# Altium PCB 角度采集板.PcbDoc
Units mil, origin at the board's own origin, x right, y up, seen from the top; angles counter-clockwise.
Board outline 741.2 x 561.03 mil, 2 copper layers (Top Layer, Bottom Layer); 22 components, 16 nets, 111 pads, 16 vias.
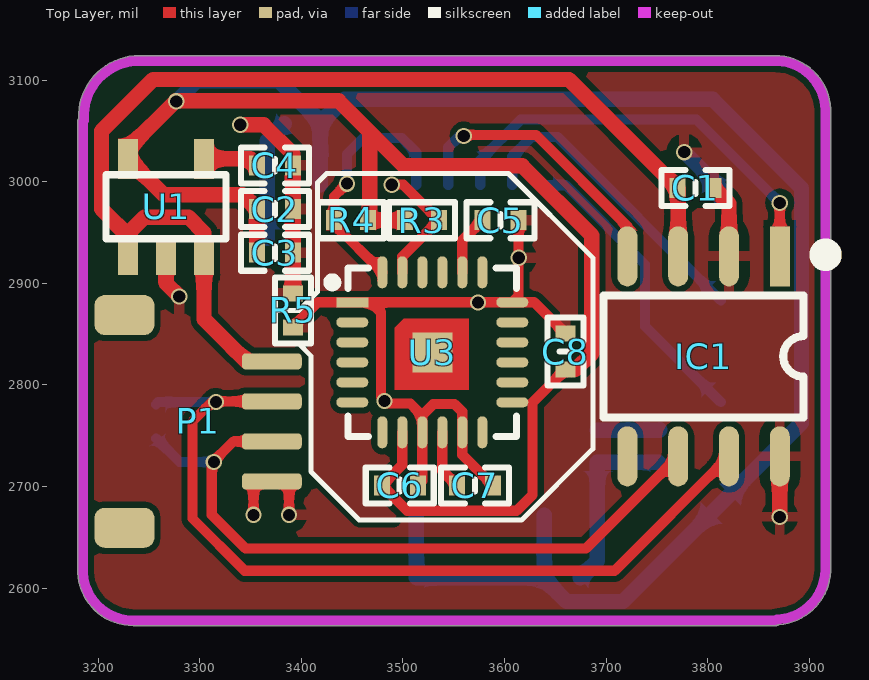
[diagram p0: Top Layer view]
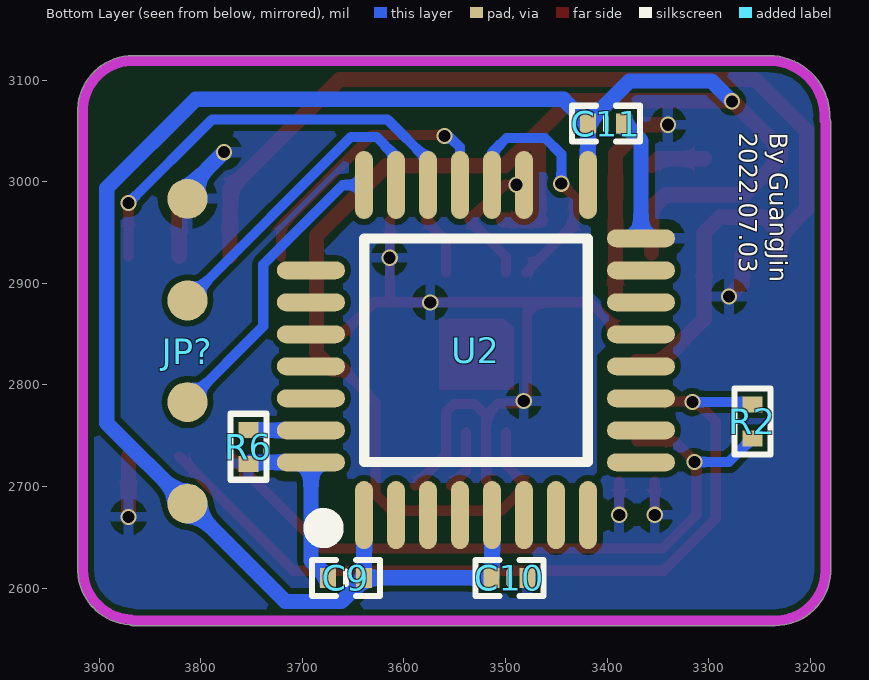
[diagram p1: Bottom Layer view, seen from below]
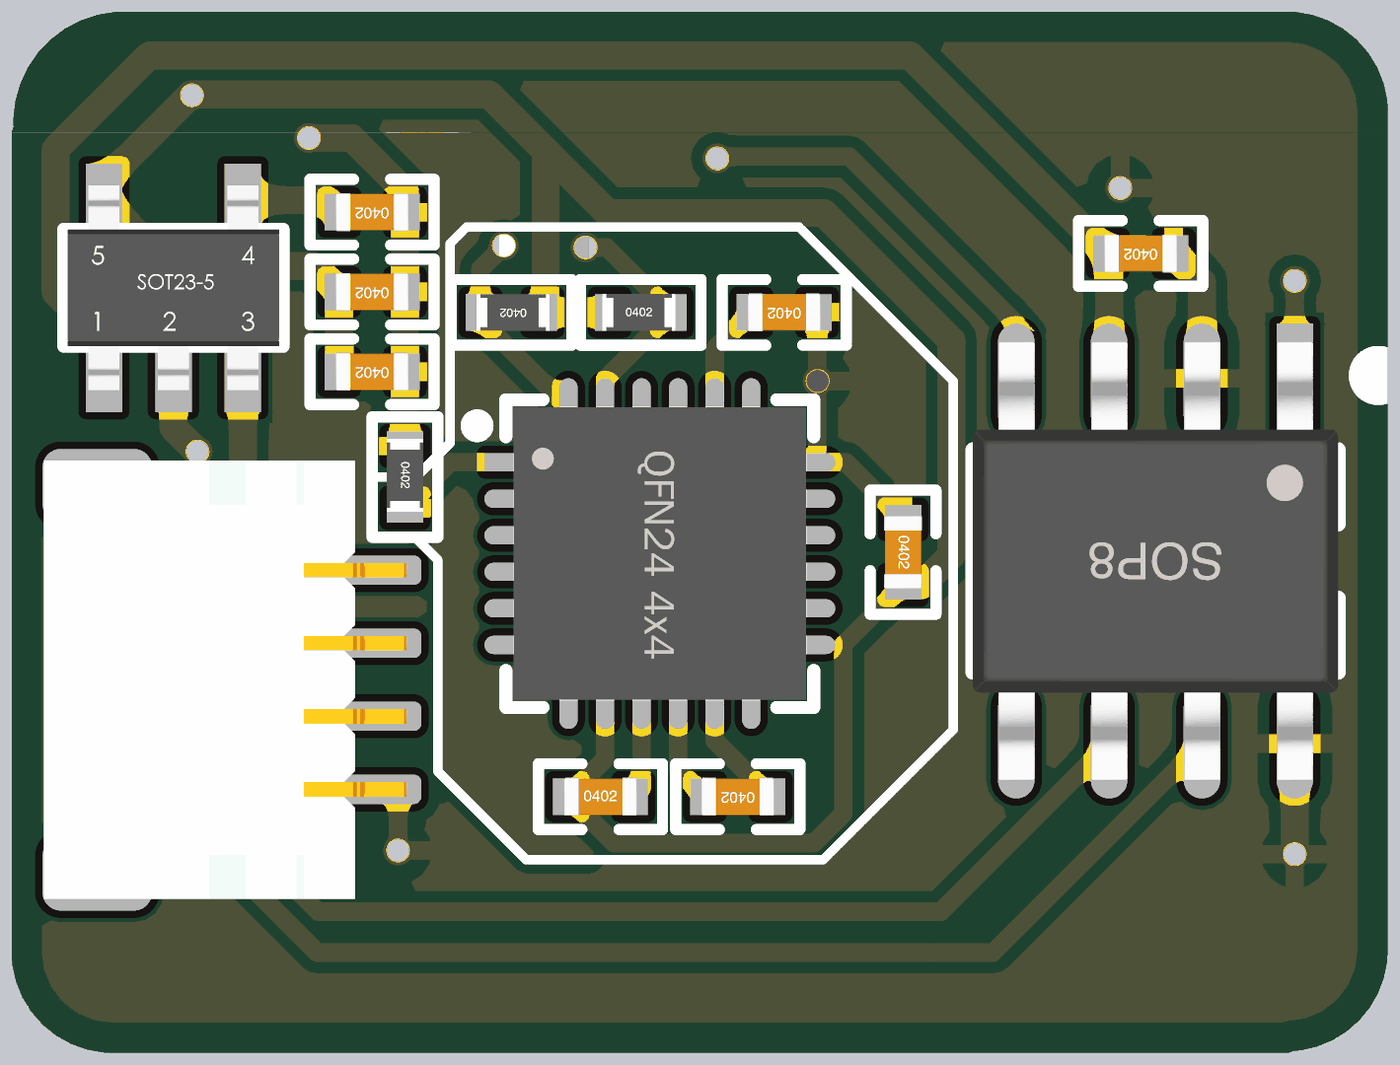
[diagram p2: 3D render of the assembled board from above, using the file's embedded part models]
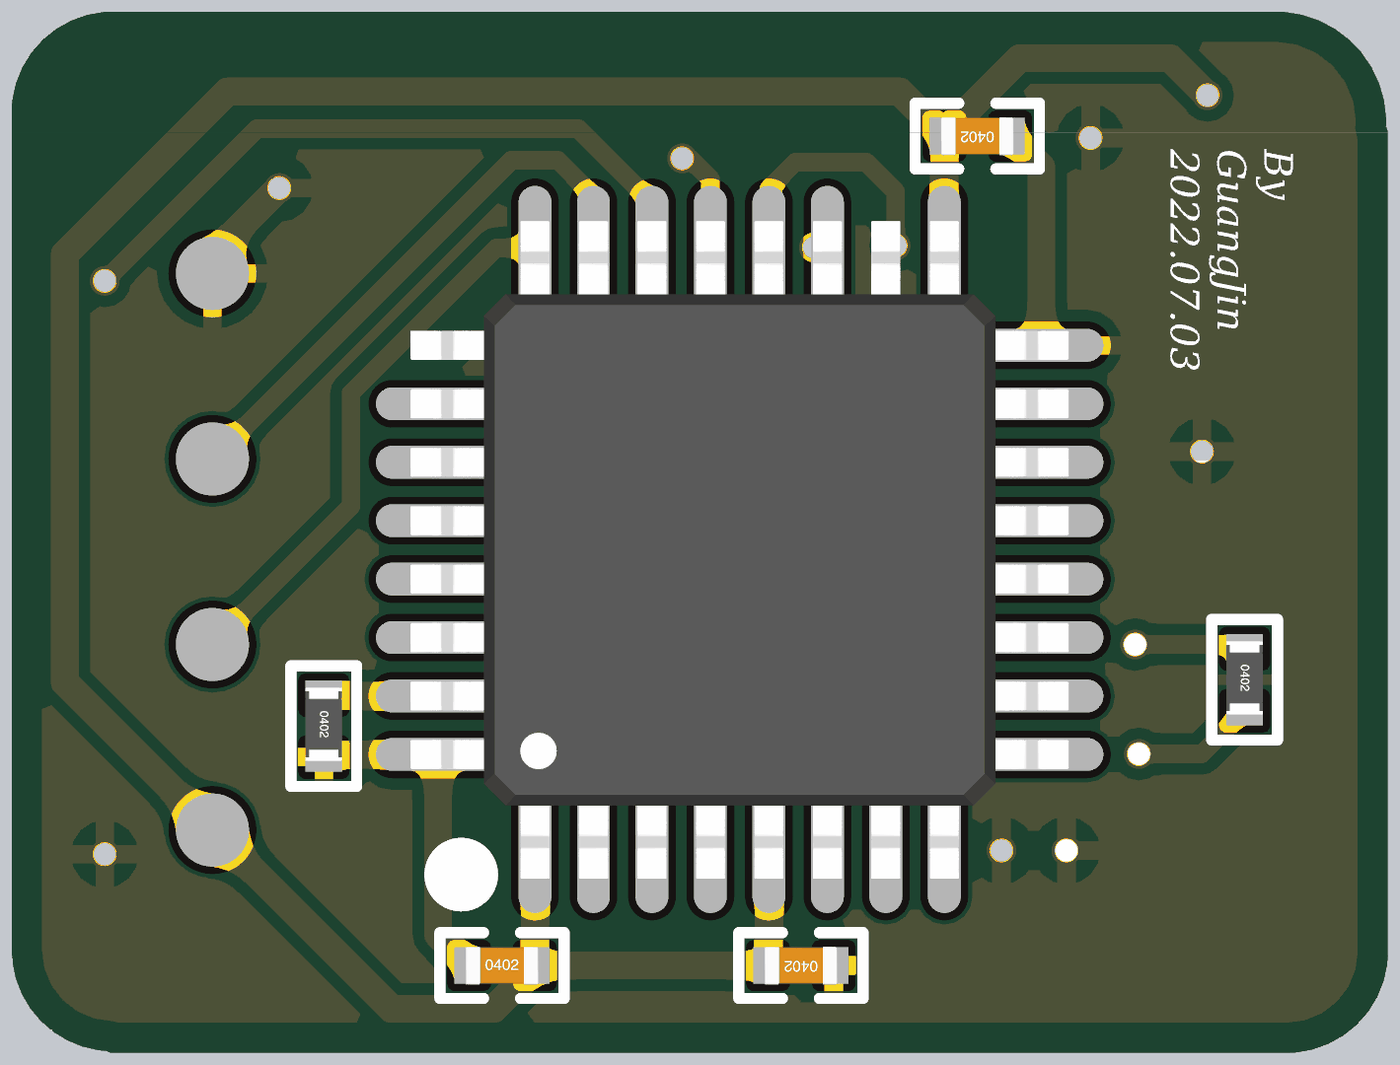
[diagram p3: 3D render of the assembled board from below, using the file's embedded part models]

## Layer stack, top to bottom
Top Solder: solder mask 0.4, Solder Resist, Dk 3.5
Top Layer: signal copper 1.4
Dielectric 1: dielectric 12.6, FR-4, Dk 4.8
Bottom Layer: signal copper 1.4
Bottom Solder: solder mask 0.4, Solder Resist, Dk 3.5

## Board outline
3179.9,2615.25 ccw(c3234.51,2617.64) 3234.56,2562.98 3867,2562.99 ccw(c3867,2568) 3869.99,2563.97 ccw(c3866.36,2618.51) 3920.97,2616.35 ccw(c3916,2617) 3921.01,2617 3921.01,3070.61 ccw(c3916.09,3071.53) 3921.1,3071.53 ccw(c3916.09,3071.53) 3921.1,3071.75 ccw(c3866.49,3069.36) 3866.44,3124.02 ccw(c3866.44,3119) 3866.41,3124.01 3240.56,3124.01 ccw(c3240.56,3064.31) 3180.9,3061.89 ccw(c3185,3059) 3179.99,3059 3179.99,2616.39 ccw(c3184.91,2615.47)

## Design rules (kind name [scope] priority, off if disabled: settings)
Clearance [All] p1: gap=6 ignorepadtopadclearanceinfootprint=FALSE
PolygonConnect [All] p1: connectstyle=Relief reliefconductorwidth=10 reliefentries=4 polygonreliefangle="90 Angle" airgapwidth=10
RoutingVias [All] p1: holewidth=28 width=50 viastyle="Through Hole" minholewidth=28 minwidth=50 maxholewidth=28 maxwidth=50
SolderMaskExpansion [All] p1: expansion=4
Width [All] p1: maxlimit=100 minlimit=6 preferedwidth=10
30 further rules are at their usual default settings.

## Components (designator, comment, footprint, x,y, rotation, side; value= is the part's Value field where it differs from the comment)
C1 "22pF" "C 0402_L" 3788,2993.75 r180 top
C2 "10uF" "C 0402_L" 3374,2973 r180 top
C3 "0.1uF" "C 0402_L" 3374,2930 r180 top
C4 "10nF" "C 0402_L" 3374,3016 r180 top
C5 "2.2u" "C 0402_L" 3596,2962 r180 top
C6 "104" "C 0402_L" 3497,2701 r0 top
C7 "104" "C 0402_L" 3571,2701 r180 top
C8 "104" "C 0402_L" 3660,2832.71 r270 top
C9 "0.1uF" "C 0402_L" 3657,2610 r180 bottom
C10 "0.1uF" "C 0402_L" 3496,2610 r0 bottom
C11 "0.1uF" "C 0402_L" 3401,3057 r0 bottom
IC1 "TJA1050" SOP8_L 3796,2828 r270 top
JP? "下载接口" 下载接口 3813,2683 r90 bottom
P1 "SH1.0-4P" SH1.0-4P 3371,2764 r270 top
R2 "120R" "R 0402_L" 3257,2765 r270 bottom
R3 "4.7K" "R 0402_L" 3517.75,2962 r0 top
R4 "4.7K" "R 0402_L" 3450,2962 r180 top
R5 "0K" "R 0402_L" 3391.72,2874.25 r270 top
R6 "10K" "R 0402_L" 3753,2740 r270 bottom
U1 "ME6211" SOT23-5 3229.6,2928 r180 top
U2 "STM32F042K6T6" LQFP32-7*7 3529,2834 r180 bottom
U3 "MPU6050" "QFN24 4x4_L" 3529,2832 r270 top

## Footprints (in the part's own frame and the unit in brackets; to place one, negate y for a bottom-side part, rotate by r counter-clockwise, add the part's x,y. Pads: shape width x height; smd on the part's side, far side on the other; paste and mask are expansions set on the pad)
"C 0402_L" [mm] "无极性贴片电容         淘宝ID:黄晶宝石"
  rect 0.4x0.5 smd: 1(-0.45,0) 2(0.45,0)
  silkscreen extent -0.85,-0.45 0.85,0.45, body extent -0.5,-0.26 0.5,0.26, height 0.53
LQFP32-7*7 [mm] "7mmx7mm，间距0.8mm 封装库来自淘宝卖家 ID：黄晶宝石"
  oval 0.45x1.7 smd: 1(-2.8,-4.12) 2(-2,-4.12) 3(-1.2,-4.12) 4(-0.4,-4.12) 5(0.4,-4.12) 6(1.2,-4.12) 7(2,-4.12) 8(2.8,-4.12) 17(2.8,4.132) 19(1.2,4.132) 20(0.4,4.132) 21(-0.4,4.132) 22(-1.2,4.132) 23(-2,4.132) 24(-2.8,4.132)
  oval 1.7x0.45 smd: 9(4.126,-2.8) 10(4.126,-2) 11(4.126,-1.2) 12(4.126,-0.4) 13(4.126,0.4) 14(4.126,1.2) 15(4.126,2) 16(4.126,2.8) 26(-4.126,2) 27(-4.126,1.2) 28(-4.126,0.4) 29(-4.126,-0.4) 30(-4.126,-1.2) 31(-4.126,-2) 32(-4.126,-2.8)
  silkscreen extent -4.06,-4.69 2.79,2.79, body extent -4.5,-4.5 4.5,4.5, height 1.45
"QFN24 4x4_L" [mm] "24脚，长x宽x高：4x4x1mm，脚距：0.5mm"
  rect 0.25x0.8 smd: 1(-1.25,-2)
  oval 0.25x0.8 smd: 2(-0.75,-2) 3(-0.25,-2) 4(0.25,-2) 5(0.75,-2) 6(1.25,-2) 13(1.25,2) 14(0.75,2) 15(0.25,2) 16(-0.25,2) 17(-0.75,2) 18(-1.25,2)
  oval 0.8x0.25 smd: 7(2,-1.25) 8(2,-0.75) 9(2,-0.25) 10(2,0.25) 11(2,0.75) 12(2,1.25) 19(-2,1.25) 20(-2,0.75) 21(-2,0.25) 22(-2,-0.25) 23(-2,-0.75) 24(-2,-1.25)
  rect 1x1 smd: 25(0,0)
  Top Layer region: -0.838,0.914 0.94,0.914 0.94,-0.94 -0.61,-0.94 -0.838,-0.711
  silkscreen extent -2.11,-2.6 2.11,2.11, body extent -2.01,-2.01 2.01,2.01, height 0.95
"R 0402_L" [mm] "1/16W贴片电阻     淘宝ID:黄晶宝石"
  rect 0.4x0.5 smd: 1(-0.4,0) 2(0.45,0)
  silkscreen extent -0.8,-0.45 0.85,0.45, body extent -0.5,-0.25 0.5,0.25, height 0.3
SH1.0-4P [mm]
  rrect50% 0.4x1.5 smd: 1(-1.5,0) 2(-0.5,0) 3(0.5,0) 4(1.5,0)
  rrect50% 1x1.5 smd: SH1(-2.659,-3.683) SH2(2.659,-3.683)
  body extent -3,-4.42 3,0.54, height 3.14
SOP8_L [mm] "5*6*1.8mm（长宽高）封装库来自淘宝卖家 ID：黄晶宝石"
  rect 1.5x0.5 smd: 1(-2.5,1.905)
  oval 1.5x0.5 smd: 2(-2.5,0.635) 3(-2.5,-0.635) 4(-2.5,-1.905) 5(2.5,-1.905) 6(2.5,-0.635) 7(2.5,0.635) 8(2.5,1.905)
  silkscreen extent -2.69,-2.5 1.52,3.2, body extent -3,-2.5 3,2.5, height 1.9
SOT23-5 [mm]
  rect 0.5x1 smd: 1(0,0) 2(-0.95,0) 3(-1.9,0) 4(-1.9,-2.4) 5(0,-2.4)
  silkscreen extent -2.45,-2 0.55,-0.4, body extent -2.4,-2.6 0.5,0.2, height 1.09
下载接口 [mm] "Jlink下载接口"
  round 1 smd: 1(0,0) 1(0,0) 2(2.54,0) 3(5.08,0) 4(7.62,0)

## Part data
C1 C5 C6 C7 C8: library part C, "贴片电容"
C2 C3 C4 C9 C10 C11: library part 电容-0402, "Capacitor"
IC1: "CAN总线收发芯片"
JP?: "Jlink下载接口"
R2 R3 R4 R5 R6: library part R, "贴片电阻"
U1: "DC降压芯片"
U3: "数字运动传感器"

## Via types
v1: diameter 16, hole 12, Top Layer to Bottom Layer, tented both sides, 16 vias

## Nets (pads, with @x,y where several pads share a name; then routed paths per layer and width w, separated by ;. In a path a pad name is that pad's centre, name@x,y a point inside that pad or via, vN(x,y) a via of type N, cw(c..) or ccw(c..) an arc to the next point about the centre after c; other vN are vias at no path point)
3.3V: C2.2 C3.2 C6.1 C8.2 C9.2 C10.2 C11.2 JP?.1 R3.1 R4.1 U1.5 U2.1 U2.5 U2.17 U3.8 U3.13 | length 2931.1
  Top Layer w10: U3.8 3499.47,2721.19 C6.1 3504.28,2676 3612,2676 3627.79,2691.79 3627.79,2782.79 C8.2
  Top Layer w15: C3.2 C2.2 3342.29,2987 3265.09,2987 U1.5 3229.6,3032.6 3276.5,3079.5 3436.91,3079.5 3500.91,3015.5 3617.5,3015.5 3686,2947 3686,2831 3670,2815 C8.2 ; 3467.5,3048.5 3467.5,2963.75 R4.1 R3.1
  Bottom Layer w15: v1(3277,3079) 3297,3099 3378.09,3099 3418.71,3058.38 C11.2 ; U2.17 3418.76,3056.95 C11.2 ; U2.5 3513.25,2610.46 C10.2 C9.2 ; U2.1 3639.24,2610.05 C9.2 ; C11.2 3442.71,3081 3805,3081 3892.5,2993.5 3892.5,2762.5 3813,2683 3716.66,2586.66 3661.25,2586.66 3639.29,2608.62 C9.2
5V: C1.2 IC1.3 P1.1 U1.1 U1.3 | length 1090.9
  Top Layer w15: U1.1 U1.1@3229.6,2946.9 ; P1.1 3345.94,2823.06 3304.4,2864.6 U1.3 3304.4,2949.6 3289,2965 3245.71,2965 3229.6,2948.89 U1.1@3229.6,2946.9 ; IC1.3 3771,2993.04 C1.2 3663.54,3100.5 3254.23,3100.5 3203.5,3049.77 3203.5,2973 U1.1@3229.6,2946.9
BOOT0: R6.1 U2.31 | length 61.8
  Bottom Layer w15: U2.31 3752.51,2755.26 R6.1
CANH: IC1.7 P1.2 R2.1 | length 837.6
  Top Layer w10: P1.2 3312.68,2783.68 3293,2764 3293,2668.37 3344.37,2617 3708.43,2617 IC1.7
  Bottom Layer w10: R2.1 3259.25,2783 v1(3316,2783)
CANL: IC1.6 P1.3 R2.2 | length 695.7
  Top Layer w10: P1.3 3333.31,2744.31 3312,2723 3312,2672 3345,2639 3680.43,2639 IC1.6
  Bottom Layer w10: R2.2 3280.29,2724 v1(3314,2724)
GND: C1.1 C2.1 C3.1 C4.1 C9.1 C10.1 C11.1 IC1.2 IC1.8 JP?.4 P1.4 R5.1 R6.2 U1.2 U2.16 U2.32 | length 809.9
  Top Layer w10: v1(3353,2672) P1.4@3353,2704.94 ; v1(3388,2672) P1.4@3388,2704.94
  Top Layer w15: U1.2 3267,2900 v1(3280,2887) ; v1(3340,3056) 3363,3056 3391.72,3027.28 C4.1 C2.1 C3.1 R5.1 ; C1.1 3821,2978.47 IC1.2 ; v1(3871,2670) IC1.8
  Bottom Layer w15: U2.16 3366.55,3040.27 C11.1 ; C9.1 3691.45,2626.73 U2.32 3751.53,2723.76 R6.2 ; v1(3777,3029) 3813,2993 JP?.4
GND-IMU: C5.1 C6.2 C7.1 C8.1 R5.2 U3.1 U3.9 U3.11 U3.18 | length 722.8
  Top Layer w10: R5.2 3416.39,2881.21 U3.1 3468.79,2881.21 ; C6.2 3519.16,2705.44 U3.9 3519.16,2769.84 ; C7.1 3558.53,2731.19 U3.11 3558.53,2773.47 3551,2781 3530,2781 3519.16,2770.16 3519.16,2769.84 ; C5.1 3613.72,2887.19 U3.18 ; C8.1 3629.22,2881.21 U3.18 ; 3468.79,2881.21 U3.18 ; 3468.79,2881.21 3478.63,2871.37 3478.63,2788.07 3485.07,2781.63 3507.37,2781.63 3519.16,2769.84
  other v1: 3482,2784 3574,2881 3614,2925
NetC4_2: C4.2 U1.4 | length 54.6
  Top Layer w15: U1.4 3349.8,3022.49 C4.2
NetC5_2: C5.2 U3.20 | length 59.4
  Top Layer w10: U3.20 3558.53,2942.24 C5.2
NetC7_2: C7.2 U3.10 | length 58.2
  Top Layer w10: U3.10 3538.84,2715.45 C7.2
PA9/SCL: R3.2 U2.19 U3.23 | length 127.1
  Top Layer w10: v1(3489,2997) 3500.46,2997 R3.2 3499.47,2926.01 U3.23
PA10/SDA: R4.2 U2.20 U3.24 | length 254
  Top Layer w10: v1(3445,2998) 3432.29,2985.29 R4.2 3432.29,2958.24 U3.24
  Bottom Layer w10: v1(3445,2998) 3445,3027 3461,3043 3499,3043 3513.25,3028.75 U2.20
PA11/CAN_RX: IC1.4 U2.21 | length 285.2
  Top Layer w10: v1(3560,3045) 3561,3046 3631,3046 3721,2956 IC1.4
  Bottom Layer w10: U2.21 3544.75,3033.75 3556,3045 v1(3560,3045)
PA12/CAN_TX: IC1.1 U2.22 | length 422.3
  Top Layer w10: IC1.1 v1(3871,2979)
  Bottom Layer w10: U2.22 3576.24,3021.24 3616,3061 3789,3061 v1(3871,2979)
SWCLK: JP?.2 U2.24 | length 297.9
  Bottom Layer w10: U2.24 3660.19,2996.68 3738.41,2918.47 3738.41,2857.59 JP?.2
SWDIO: JP?.3 U2.23 | length 308
  Bottom Layer w10: U2.23 3607.74,3024.74 3627,3044 3652,3044 JP?.3
pads on no net: IC1.5 P1.SH1 P1.SH2 U2.2 U2.3 U2.4 U2.6 U2.7 U2.8 U2.9 U2.10 U2.11 U2.12 U2.13 U2.14 U2.15 U2.26 U2.27 U2.28 U2.29 U2.30 U3.2 U3.3 U3.4 U3.5 U3.6 U3.7 U3.12 U3.14 U3.15 U3.16 U3.17 U3.19 U3.21 U3.22 U3.25

## Polygon pours and split planes (outlines as drawn)
GND on Top Layer "Top Layer-GND" (solid, remove dead copper, pour order 6): 3120,3163 3989,3163 3983,3157 3983,2498 3120,2498 3109,2487
GND-IMU on Top Layer "Top Layer-GND-IMU" (solid, remove dead copper, pour order 0): 3374,2873 3375,2874 3399,2874 3416,2891 3416,2999 3425,3008 3426,3007 3604,3007 3687,2924 3687,2736.5 3616.5,2666 3457,2666 3409,2714 3410,2715 3410,2829 3398,2841 3375,2841
GND on Bottom Layer "Bottom Layer-GND" (solid, remove dead copper, pour order 4): 3134,3160 3135,3161 4044,3161 4044,2585 3961,2502 3065,2502
GND-IMU on Bottom Layer "Bottom Layer-GND-IMU" (solid, remove dead copper, pour order 2): 3374,2873 3397,2873 3415,2891 3416,2891 3416,2989 3425,2998 3425,3009 3602,3009 3686,2925 3687,2925 3687,2737 3617,2667 3457,2667 3410,2714 3410,2829 3399,2840 3377,2840 3375,2842

## Keep-outs
Keep-Out Layer:
  lines w10: 3184.91,2615.47 ccw(c3234.51,2617.64) 3234.56,2568 3867,2568 ; 3185,2615.47 3185,3059 ; 3186.02,3060.24 cw(c3240.56,3064.31) 3242.18,3118.98 ; 3240.56,3119 3866.49,3119 ; 3866.44,3119 cw(c3866.49,3069.36) 3916.09,3071.53 ; 3868.53,2568.91 ccw(c3866.36,2618.51) 3916,2618.56 ; 3916,2617 3916,3071.53

## Silkscreen, mask and mechanical layers (free items; w line width, h text height)
Top Overlay:
  lines w5: 3374,2840.79 3397.21,2840.79 3409.43,2828.57 3409.43,2714.57 3457,2667 3617,2667 3687,2737 3687,2925 3604,3008 3543,3008 3425,3008 3416,2999 3416,2891.57 3397.7,2873.27 3374,2873.27
Bottom Overlay:
  text "By GuangJin / 2022.07.03" at 3276,3048 h30 r90